# Altium PCB ds3231.PcbDoc
Units mil, origin at the board's own origin, x right, y up, seen from the top; angles counter-clockwise.
Board outline 1160 x 1275 mil, 2 copper layers (Top Layer, Bottom Layer); 12 components, 7 nets, 80 pads, 26 vias.
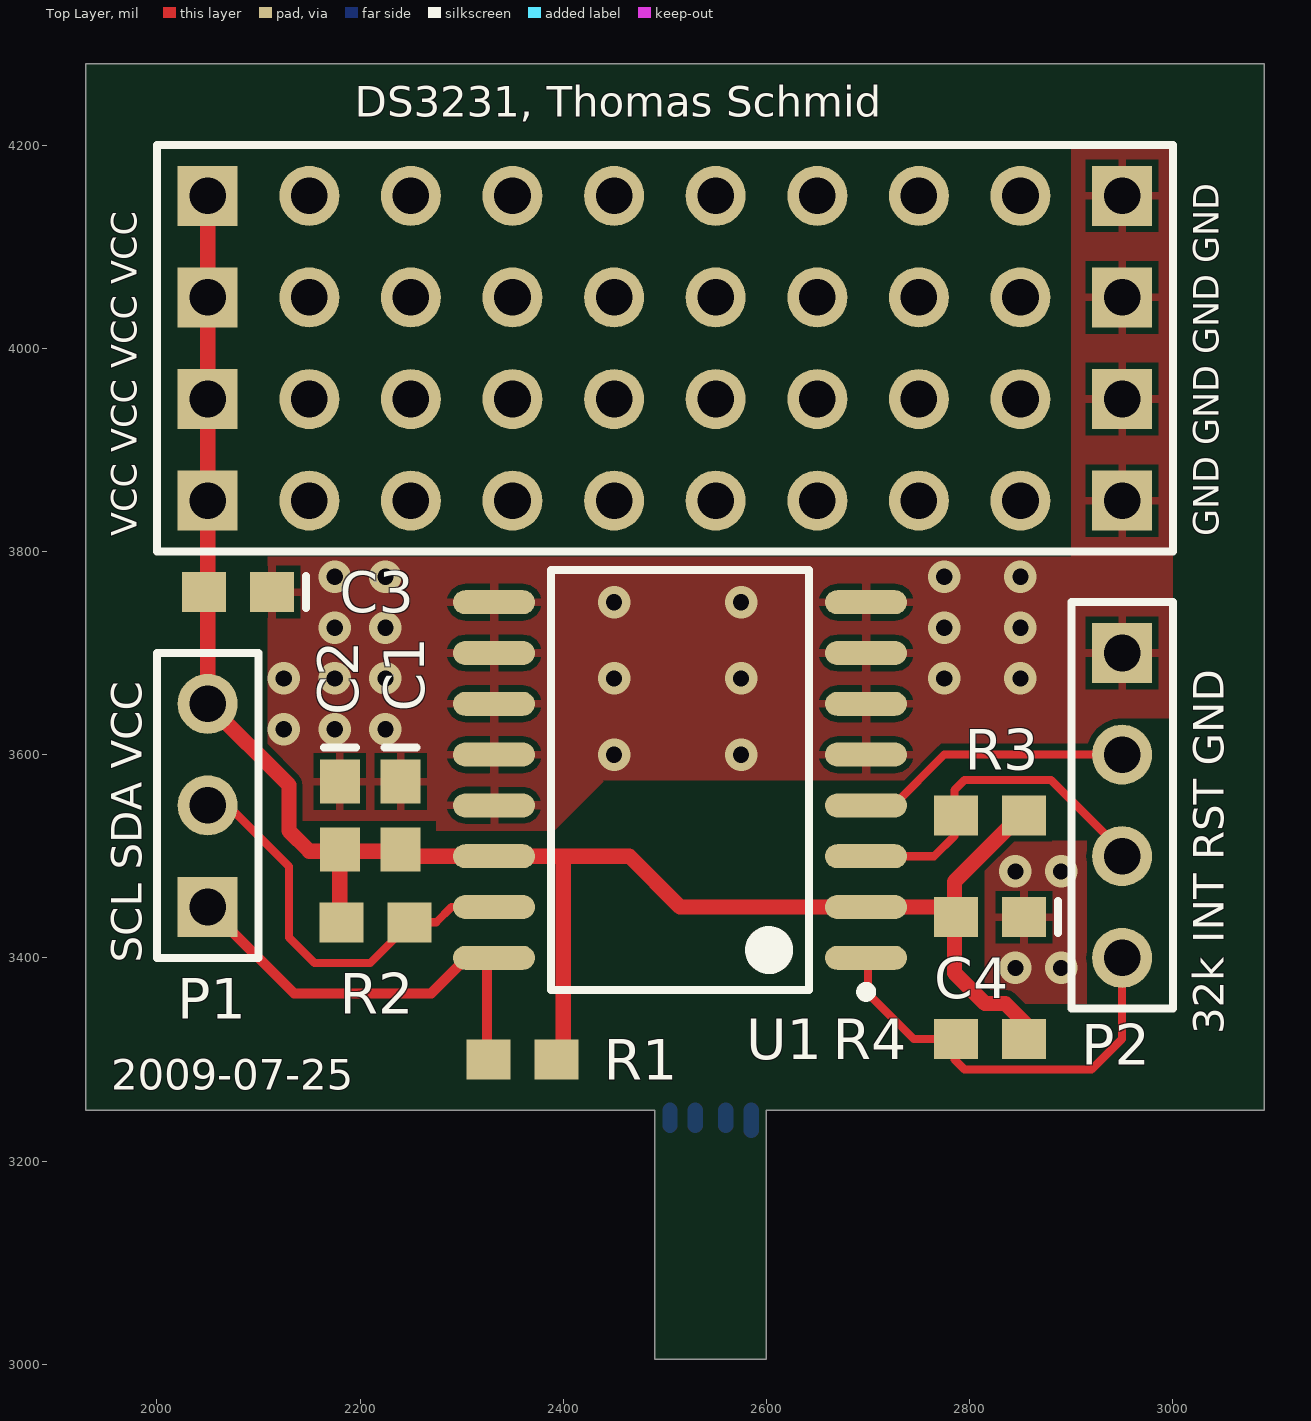
[diagram p0: Top Layer view]
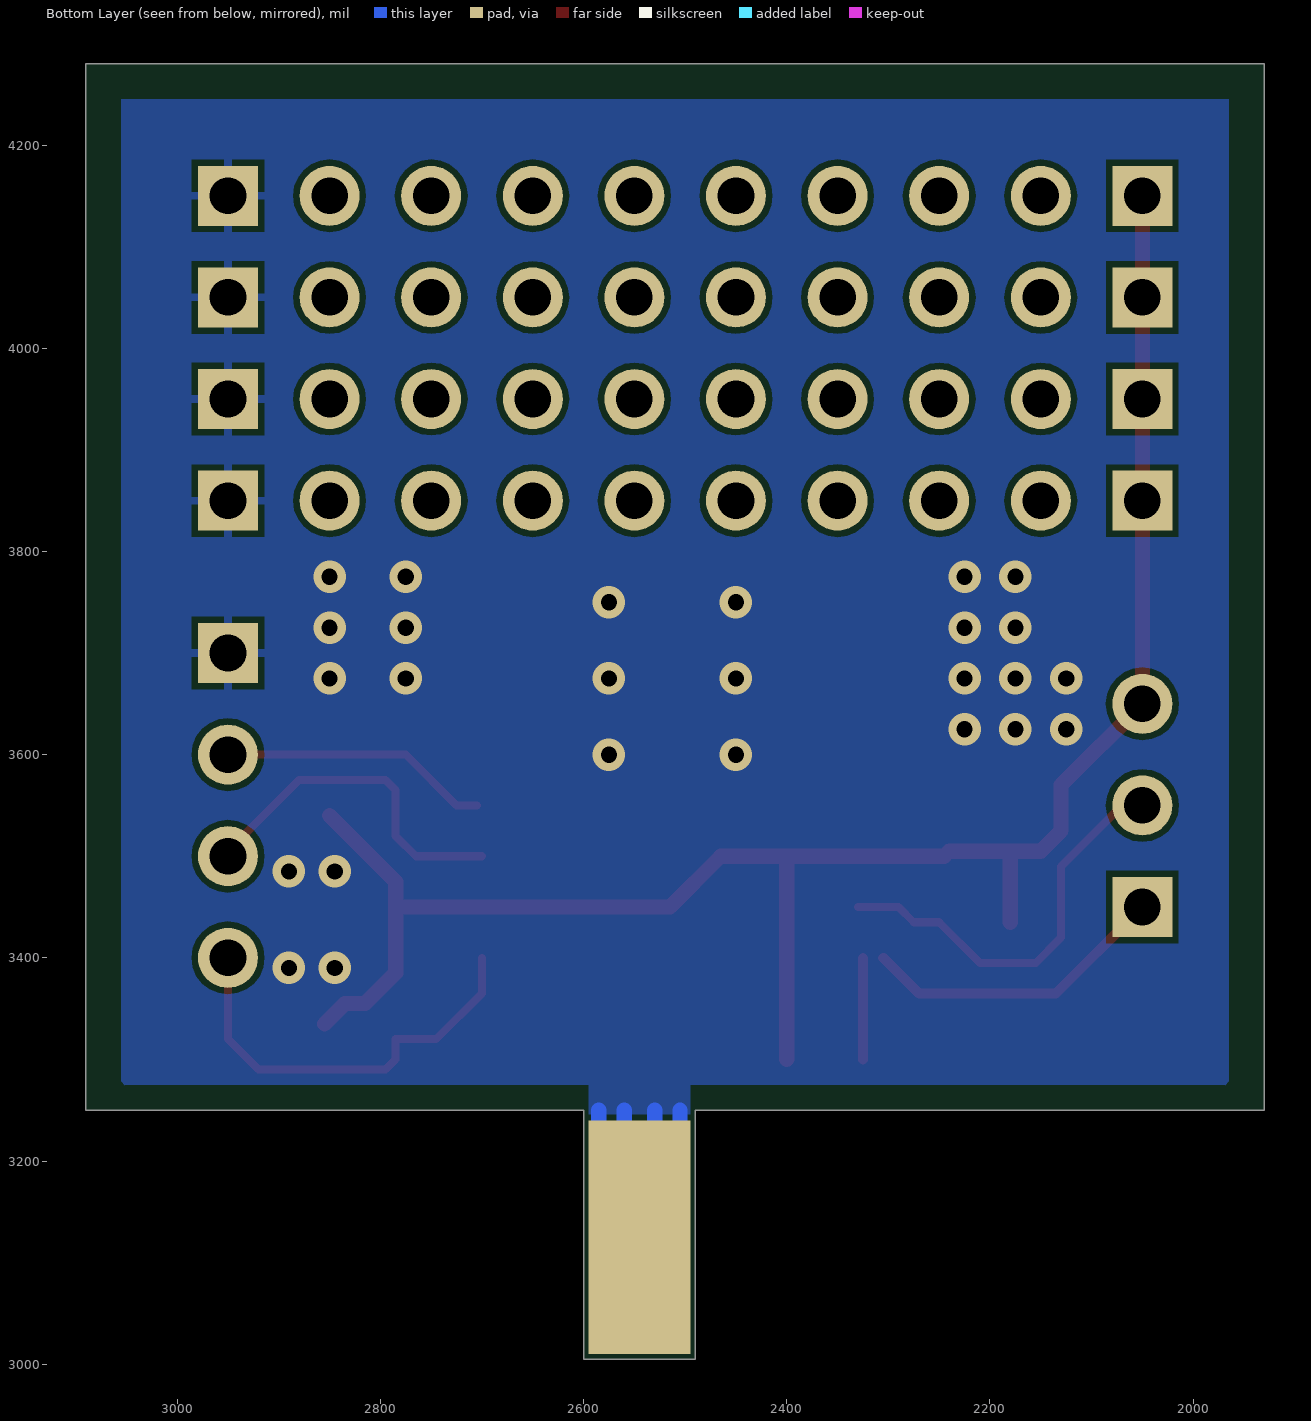
[diagram p1: Bottom Layer view, seen from below]

## Layer stack, top to bottom
Top Layer: signal copper 1.4
Dielectric: core 12.6, FR-4, Dk 4.8
Bottom Layer: signal copper 1.4

## Board outline
1930,3250 2490,3250 2490,3005 2600,3005 2600,3250 3090,3250 3090,4280 1930,4280

## Design rules (kind name [scope] priority, off if disabled: settings)
Clearance "Clearance~Sunstone Circuits" [All] p1: gap=6 // Sunstone Circuits Minimum Clearance Rule (Double Sided)
ComponentClearance [All] p1: gap=10 collisioncheckmode=3 verticalgap=10
HoleSize "HoleSize~Sunstone Circuits" [All] p1: absolutevalues=TRUE maxlimit=251 minlimit=16 maxpercent=80.000 minpercent=20.000 // SSC Hole Size Rule For Single Sided & Double Sided Designs.
MinimumAnnularRing "MinimumAnnularRing~Sunstone Circuits" [All] p1: minimumring=7 // Sunstone Circuits Minimum Annular Ring (Double Sided)
PlaneClearance "PlaneClearance~Sunstone Circuits" [All] p1: clearance=12 // Sunstone Circuits Power Plane Clearance Rule (Double Sided)
PlaneConnect "PlaneConnect~Sunstone Circuits" [All] p1: planeconnectstyle=Relief reliefexpansion=10 reliefentries=4 reliefconductorwidth=8 reliefairgap=10 // Sunstone Circuits Power Plane Connect Rule (Double Sided)
PolygonConnect [All vs IsVia] p1: connectstyle=Direct reliefconductorwidth=10 reliefentries=4 polygonreliefangle="90 Angle"
PolygonConnect "PolygonConnect~Sunstone Circuits" [All] p2: connectstyle=Relief reliefconductorwidth=8 reliefentries=4 polygonreliefangle="90 Angle" // Sunstone Circuits Polygon Connect Style (Double Sided)
RoutingVias "RoutingVias~Sunstone Circuits" [All] p1: holewidth=16 width=30 viastyle="Through Hole" minholewidth=16 minwidth=30 maxholewidth=20 maxwidth=40 // Sunstone Circuits Routing Vias Rule (Double Sided)
ShortCircuit "ShortCircuit~Sunstone Circuits" [All] p1: allowed=FALSE // Sunstone Circuits Short Circuit Rule~Do Not Allow (Double Sided)
SolderMaskExpansion "SolderMaskExpansion~Sunstone Circuits" [All] p1: expansion=3 // Sunstone Circuits Solder Mask Expansion Rule (Double Sided)
TestPointUsage [All] p1: valid=0 allowmultiple=FALSE
Testpoint [All] p1: side=15 testpointundercomponent=TRUE minsize=40 maxsize=100 preferedsize=60 minholesize=0 maxholesize=40 preferedholesize=32 testpointgrid=1 style=1023 order=0123456789
ViasUnderSMD "ViasUnderSMD~Sunstone Circuits" [All] p1: allowed=FALSE // Sunstone Circuits Vias Under SMD~Do Not Allow (Double Sided)
Width "Width~Sunstone Circuits" [All] p1: maxlimit=100 minlimit=6 preferedwidth=10 // Sunstone Circuits Minimum Width Rule (Double Sided)
14 further rules are at their usual default settings.

## Classes and differential pairs
component class ds3231: C1 C2 C3 C4 P1 P2 R1 R2 R3 R4 U1

## Components (designator, comment, footprint, x,y, rotation, side; value= is the part's Value field where it differs from the comment)
C1 "Cap" CC1608-0603 2240,3540 r270 top
C2 "Cap" CC1608-0603 2180,3540 r270 top
C3 "Cap" CC1608-0603 2080,3760 r180 top
C4 "Cap" CC1608-0603 2820,3440 r180 top
P1 "Header 3" HDR1X3 2050,3450 r90 top
P2 "Header 4" HDR1X4 2950,3700 r270 top
R1 "Res3" CR1608-0603 2360,3300 r0 top
R2 "Res3" CR1608-0603 2215,3435 r180 top
R3 "Res3" CR1608-0603 2820,3540 r0 top
R4 "Res3" CR1608-0603 2820,3320 r0 top
U1 "MAX/DS3231" "SOIC16 - DS3231" 2515,3575 r180 top
? "" Protoarea 2000,3800 r0 top

## Footprints (in the part's own frame and the unit in brackets; to place one, negate y for a bottom-side part, rotate by r counter-clockwise, add the part's x,y. Pads: shape width x height; smd on the part's side, far side on the other; paste and mask are expansions set on the pad)
CC1608-0603 [mm] "Chip Capacitor; Body 1.6 x 0.8 mm (LxW typ)"
  rect 1.1x1 smd mask+0: 1(-0.85,0) 2(0.85,0)
  silkscreen extent -1.7,-0.4 -1.7,0.4
CR1608-0603 [mm] "Chip Resistor; Body 1.6 x 0.8 mm (LxW typ)"
  rect 1.1x1 smd mask+0: 1(-0.85,0) 2(0.85,0)
HDR1X3 [mm] "Connector; Header; 3 Position"
  rect 1.5x1.5 hole 0.914 mask+0: 1(0,0)
  round 1.5 hole 0.914 mask+0: 2(2.54,0) 3(5.08,0)
  silkscreen extent -1.27,-1.27 6.35,1.27
HDR1X4 [mm] "Connector; Header; 4 Position"
  rect 1.5x1.5 hole 0.914 mask+0: 1(0,0)
  round 1.5 hole 0.914 mask+0: 2(2.54,0) 3(5.08,0) 4(7.62,0)
  silkscreen extent -1.27,-1.27 8.89,1.27
Protoarea [mm]
  rect 1.5x1.5 hole 0.914 mask+0: 1(1.27,1.27) 1(1.27,3.81) 1(1.27,6.35) 1(1.27,8.89) 1(24.13,1.27) 1(24.13,3.81) 1(24.13,6.35) 1(24.13,8.89)
  round 1.5 hole 0.914 mask+0: 1(3.81,1.27) 1(3.81,3.81) 1(3.81,6.35) 1(3.81,8.89) 1(6.35,1.27) 1(6.35,3.81) 1(6.35,6.35) 1(6.35,8.89) 1(8.89,1.27) 1(8.89,3.81) 1(8.89,6.35) 1(8.89,8.89) 1(11.43,1.27) 1(11.43,3.81) 1(11.43,6.35) 1(11.43,8.89) 1(13.97,1.27) 1(13.97,3.81) 1(13.97,6.35) 1(13.97,8.89) 1(16.51,1.27) 1(16.51,3.81) 1(16.51,6.35) 1(16.51,8.89) 1(19.05,1.27) 1(19.05,3.81) 1(19.05,6.35) 1(19.05,8.89) 1(21.59,1.27) 1(21.59,3.81) 1(21.59,6.35) 1(21.59,8.89)
  silkscreen extent 0,0 25.4,10.16
"SOIC16 - DS3231" [mm] "SOIC, 16-Leads, Body 10.5x7.6mm (max), Pitch 1.27mm, IPC Medium Density"
  oval 2.05x0.6 smd mask+0: 1(-4.65,4.445) 2(-4.65,3.175) 3(-4.65,1.905) 4(-4.65,0.635) 5(-4.65,-0.635) 6(-4.65,-1.905) 7(-4.65,-3.175) 8(-4.65,-4.445) 9(4.65,-4.445) 10(4.65,-3.175) 11(4.65,-1.905) 12(4.65,-0.635) 13(4.65,0.635) 14(4.65,1.905) 15(4.65,3.175) 16(4.65,4.445)
  silkscreen extent -4.78,-5.25 3.22,5.42, body extent -3.81,-5.23 3.81,5.23, height 2.67

## Part data
C1 C2 C3 C4: "Capacitor"
P1: "Header, 3-Pin"
P2: "Header, 4-Pin"
R1 R2 R3 R4: "Resistor"
U1: "MAX DS3231"

## Free pads (board coordinates)
  rect 100x230 smd far side mask+0: 0(2545,3125)

## Via types
v1: diameter 32, hole 16, Top Layer to Bottom Layer, tented both sides, 26 vias

## Nets (pads, with @x,y where several pads share a name; then routed paths per layer and width w, separated by ;. In a path a pad name is that pad's centre, name@x,y a point inside that pad or via, vN(x,y) a via of type N, cw(c..) or ccw(c..) an arc to the next point about the centre after c; other vN are vias at no path point)
GND: ?.1@2950,3850 ?.1@2950,3950 ?.1@2950,4050 ?.1@2950,4150 C1.1 C2.1 C3.1 C4.1 P2.1 pad.0 U1.5 U1.6 U1.7 U1.8 U1.9 U1.10 U1.11 U1.12 U1.13 | length 65
  Bottom Layer w15: pad.0@2505,3235 2505,3250 ; pad.0@2530,3235 2530,3250 ; pad.0@2560,3235 2560,3250 ; pad.0@2585,3230 2585,3250
  other v1: 2845,3390 2890,3390 2845,3485 2890,3485 2450,3600 2575,3600 2125,3625 2175,3625 2225,3625 2125,3675 2175,3675 2225,3675 2450,3675 2575,3675 2775,3675 2850,3675 2175,3725 2225,3725 2775,3725 2850,3725 2450,3750 2575,3750 2175,3775 2225,3775 2775,3775 2850,3775
NetP1_1: P1.1 R1.1 U1.16 | length 402.6
  Top Layer w10: P1.1@2055,3445 2135,3365 2270,3365 U1.16@2305,3400 ; R1.1@2325,3300 U1.16@2325,3400
  Top Layer w15: P1.1@2050,3445 P1.1@2055,3445
NetP1_2: P1.2 R2.1 U1.15 | length 408
  Top Layer w8: P1.2 2070,3550 2130,3490 2130,3420 2155,3395 2210,3395 2250,3435 2275,3435 2290,3450 U1.15@2330,3450
NetP2_2: P2.2 U1.4 | length 265.7
  Top Layer w8: U1.4@2705,3550 2725,3550 2775,3600 P2.2
NetP2_3: P2.3 R3.1 U1.3 | length 336.4
  Top Layer w8: U1.3@2700,3500 2765,3500 2785,3520 2785,3565 2795,3575 2880,3575 P2.3@2950,3505
NetP2_4: P2.4 R4.1 U1.1 | length 415.2
  Top Layer w8: U1.1@2700,3400 2700,3365 2745,3320 2785,3320 2785,3300 2795,3290 2920,3290 2950,3320 P2.4@2950,3395
VCC: ?.1@2050,3850 ?.1@2050,3950 ?.1@2050,4050 ?.1@2050,4150 C1.2 C2.2 C3.2 C4.2 P1.3 R1.2 R2.2 R3.2 R4.2 U1.2 U1.14 | length 1886.8
  Top Layer w8: C1.2@2240,3505 C1.2@2245,3500
  Top Layer w15: ?.1@2050,4150 P1.3 2130,3570 2130,3525 2150,3505 C1.2@2240,3505 ; R2.2@2180,3435 C2.2@2180,3505 ; C1.2@2245,3500 2465,3500 2515,3450 C4.2@2785,3450 ; R1.2@2400,3300 2400,3500 ; R3.2@2850,3540 2785,3475 2785,3385 2815,3355 2835,3355 R4.2@2855,3335
pads on no net: ?.1@2150,3850 ?.1@2150,3950 ?.1@2150,4050 ?.1@2150,4150 ?.1@2250,3850 ?.1@2250,3950 ?.1@2250,4050 ?.1@2250,4150 ?.1@2350,3850 ?.1@2350,3950 ?.1@2350,4050 ?.1@2350,4150 ?.1@2450,3850 ?.1@2450,3950 ?.1@2450,4050 ?.1@2450,4150 ?.1@2550,3850 ?.1@2550,3950 ?.1@2550,4050 ?.1@2550,4150 ?.1@2650,3850 ?.1@2650,3950 ?.1@2650,4050 ?.1@2650,4150 ?.1@2750,3850 ?.1@2750,3950 ?.1@2750,4050 ?.1@2750,4150 ?.1@2850,3850 ?.1@2850,3950 ?.1@2850,4050 ?.1@2850,4150

## Polygon pours and split planes (outlines as drawn)
GND on Top Layer "Top Layer-No Net" (solid, pour order 1000): 2815,3515 2815,3355 2915,3355 2915,3515
GND on Top Layer "Top Layer-No Net" (solid, pour order 1001): 2900,4200 2900,3790 3000,3790 3000,4200
GND on Top Layer "Top Layer-No Net" (solid, pour order 1002): 2109,3795 2109,3535.07 2275,3535 2275,3525 2336,3525 2336,3795
GND on Top Layer "Top Layer-No Net" (solid, pour order 1003): 2703,3795 2702,3794 2702,3575 2321,3575 2320,3574 2330,3584 2330,3795
GND on Top Layer "Top Layer-No Net" (solid, pour order 1004): 2336,3525 2391,3525 2443,3577 2443,3578 2336,3578
GND on Top Layer "Top Layer-No Net" (solid, pour order 1005): 2694,3795 2694,3575 2736,3575 2772,3611 2950,3611 2950,3636 3000,3636 3000,3795
GND on Bottom Layer "Top Layer-No Net" (solid, pour order 1003): 1965,4245 3055,4245 3055,3274.8 2595,3275 2595,3246 2495,3246 2495,3275 1965,3274.8

## Silkscreen, mask and mechanical layers (free items; w line width, h text height)
Top Overlay:
  text "DS3231, Thomas Schmid" at 2195,4228 h30
  text "VCC VCC VCC VCC" at 1980,3815 h25 r90
  text "GND GND GND GND" at 3045,3815 h25 r90
  text "SCL SDA VCC" at 1985,3395 h30 r90
  text "32k INT RST GND" at 3050,3325 h30 r90
  text "2009-07-25" at 1955,3270 h30
Mechanical 14:
  the board outline again, w8